# Altium PCB Controller_Hardware_SDR.PcbDoc
Units mil, origin at the board's own origin, x right, y up, seen from the top; angles counter-clockwise.
Board outline 5040 x 1990 mil, 2 copper layers (Top Layer, Bottom Layer); 27 components, 29 nets, 130 pads, 25 vias.
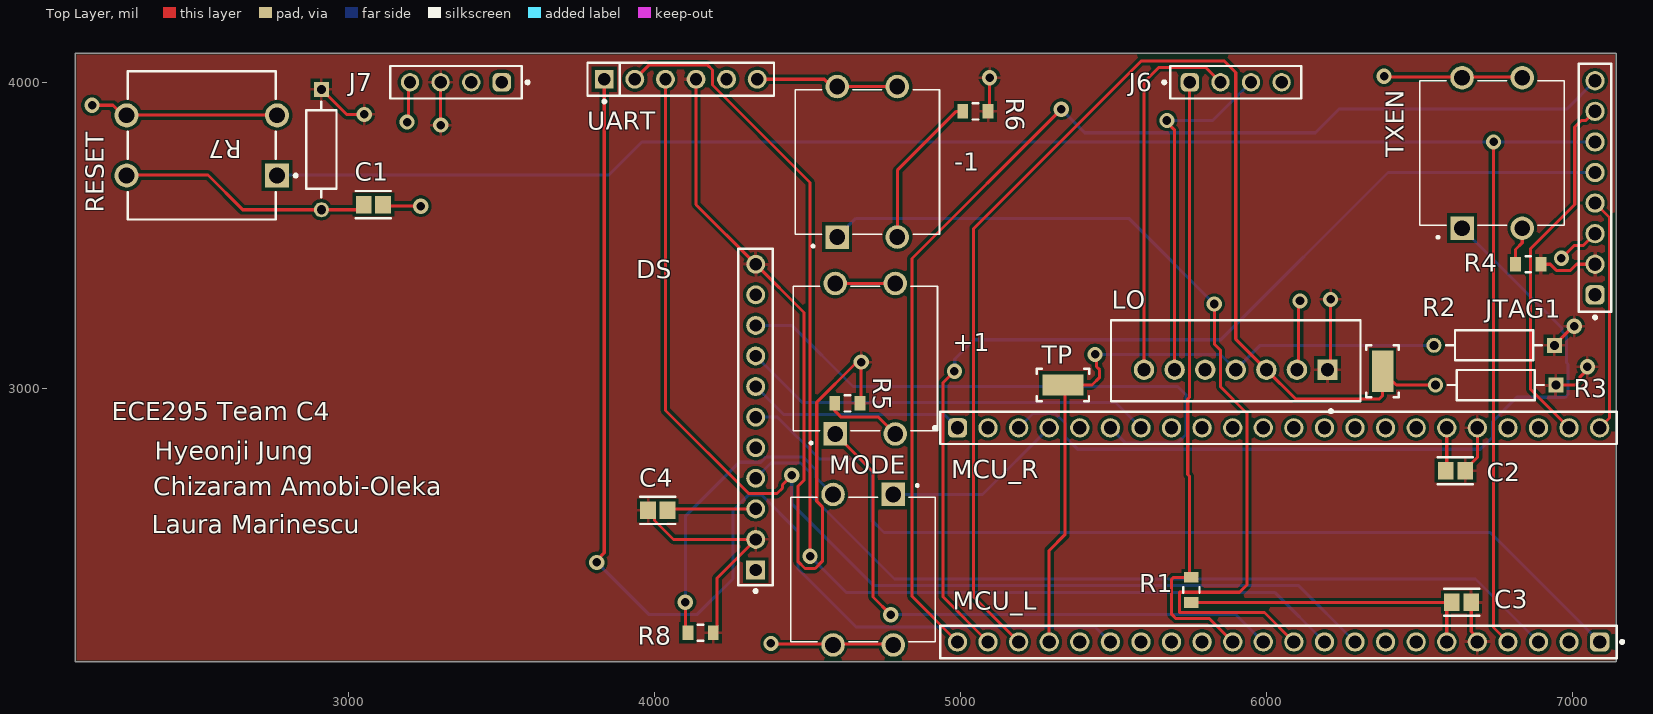
[diagram p0: Top Layer view]
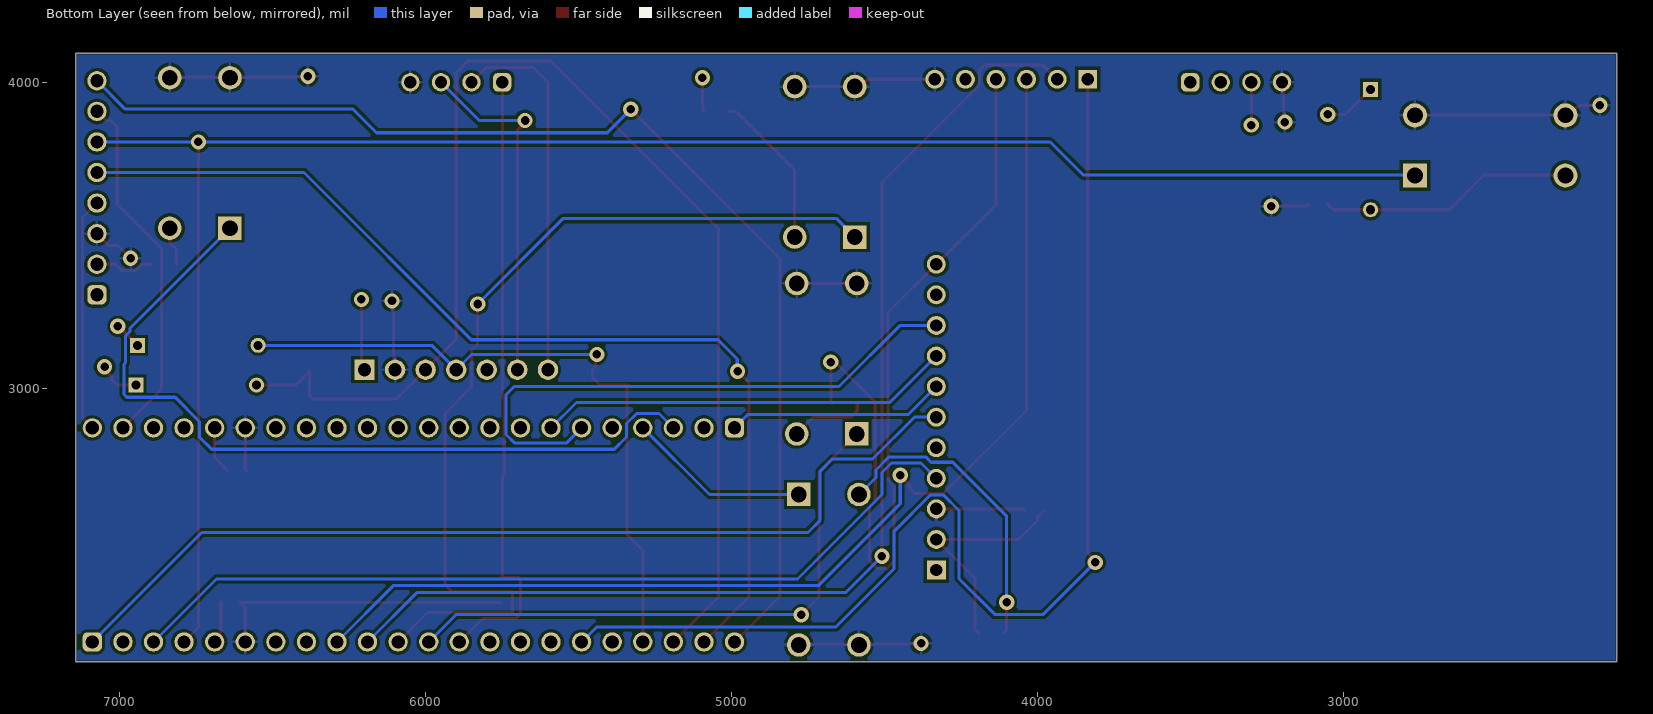
[diagram p1: Bottom Layer view, seen from below]
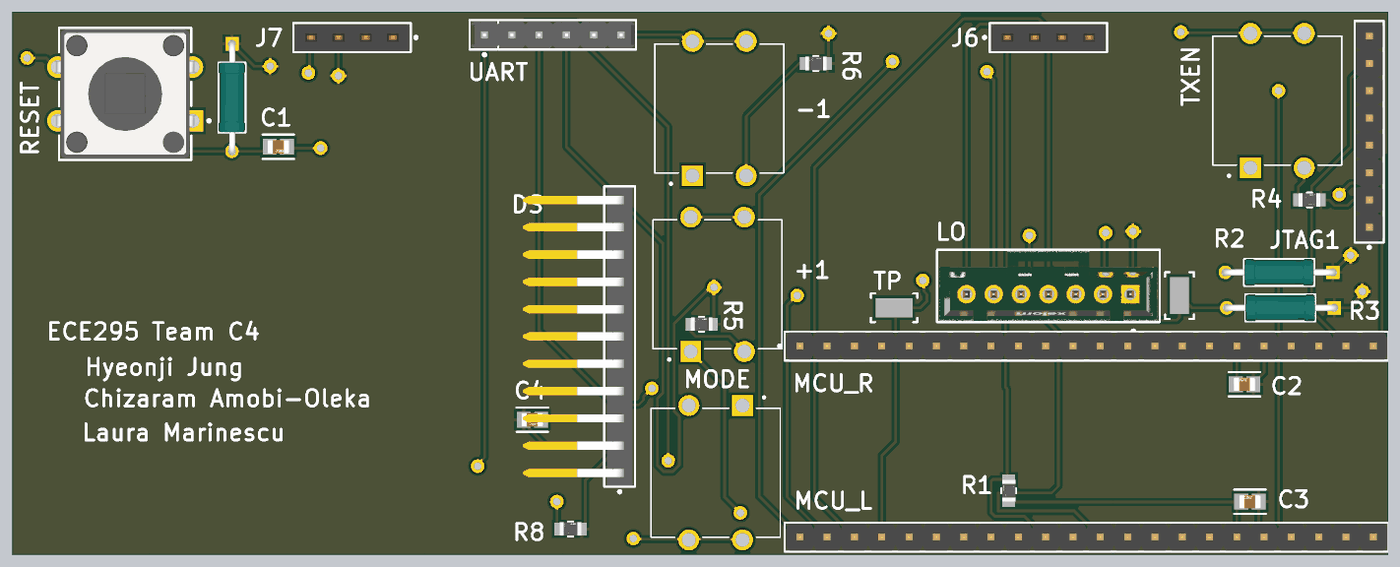
[diagram p2: 3D render of the assembled board from above, using the file's embedded part models]

## Layer stack, top to bottom
Top Solder: solder mask 0.4, Solder Resist, Dk 3.5
Top Layer: signal copper 1.4
Dielectric 1: dielectric 12.6, FR-4, Dk 4.8
Bottom Layer: signal copper 1.4
Bottom Solder: solder mask 0.4, Solder Resist, Dk 3.5

## Board outline
2105,4095 2105,2105 7145,2105 7145,4095

## Design rules (kind name [scope] priority, off if disabled: settings)
Clearance Clearance_1 [All] p1: gap=10 ignorepadtopadclearanceinfootprint=FALSE except(0: Arc-Hole Track-Hole SMDPad-Hole THPad-Hole Via-Hole Fill-Hole Poly-Hole Region-Hole Text-Hole)
Clearance [All] p2: gap=10 ignorepadtopadclearanceinfootprint=FALSE except(0: Arc-Hole Track-Hole SMDPad-Hole THPad-Hole Via-Hole Fill-Hole Poly-Hole Region-Hole Text-Hole)
HoleSize [All] p1: absolutevalues=TRUE maxlimit=200 minlimit=1 maxpercent=80.000 minpercent=20.000
PolygonConnect [All] p1: connectstyle=Relief reliefconductorwidth=10 reliefentries=4 polygonreliefangle="90 Angle" airgapwidth=10
RoutingVias [All] p1: holewidth=28 width=50 viastyle="Through Hole" minholewidth=28 minwidth=50 maxholewidth=28 maxwidth=50
SilkToSilkClearance [All] p1: silktosilkclearance=3.94
SilkToSolderMaskClearance [IsPad] p1: minsilkscreentomaskgap=7.87 clearancetoexposedcopper=TRUE
SolderMaskExpansion [All] p1: expansion=4 istentingtop=FALSE
SupplyNets "Schematic Supply Nets_1" [InNet('GND')] p1: voltage=0.000
SupplyNets "Schematic Supply Nets" [InNet('3V3')] p2: voltage=0.000
Width Width_1 [(InNet('+3.3') OR InNet('+5') OR InNet('VCC') OR InNet('ANT') or InNet('PA_OUT') or InNet('VIN'))] p1: maxlimit=20 minlimit=20 preferedwidth=20
Width [All] p2: maxlimit=10 minlimit=10 preferedwidth=10
27 further rules are at their usual default settings.

## Classes and differential pairs
component class M2_fixed_J6_j7_pins: C1 C2 C3 C4 DS J6 J7 JTAG1 LO MCU_L MCU_R R2 R3 R4 R5 R7

## Components (designator, comment, footprint, x,y, rotation, side; value= is the part's Value field where it differs from the comment)
+1 "VS-1213-67-160GF" SW_VS-1213-67-160GF 4688.43,3096.06 r90 top (schematic designator S2)
-1 "VS-1213-67-160GF" SW_VS-1213-67-160GF 4695,3740 r90 top locked (schematic designator S1)
C1 "08051C104K4T2A" FP-0805-L_2_01_0_2-W_1_25-IPC_B 3080,3600 r0 top
C2 "08051C104K4T2A" FP-0805-L_2_01_0_2-W_1_25-IPC_B 6618.28,2730 r180 top
C3 "08051C104K4T2A" FP-0805-L_2_01_0_2-W_1_25-IPC_B 6638.28,2300 r180 top
C4 "08051C104K4T2A" FP-0805-L_2_01_0_2-W_1_25-IPC_B 4010,2600 r0 top
DS "22-12-2111" FP-22-12-2111-MFG 4330,2905 r270 top locked
J6 "61300411821" 61300411821 5900,4000 r0 top locked
J7 "61300411821" 61300411821 3350,4000 r180 top locked
JTAG1 "61300811121" 61300811121 7075,3655 r90 top
LO "70543-0006" FP-70543-0006-MFG 5900,3090 r0 top
MCU_L "61302211121" 61302211121 6040,2170 r180 top locked
MCU_R "61302211121" 61302211121 6040,2870 r0 top locked
MODE "VS-1213-67-160GF" SW_VS-1213-67-160GF 4681.57,2406.06 r270 top (schematic designator S4)
R1 "RT0805FRE0710KL" FP-RT0805-MFG 5755,2340 r90 top value=10KΩ
R2 "10k" FP-MRS25-MFG 6745,3140 r180 top
R3 "10k" FP-MRS25-MFG 6750,3010 r180 top
R4 "RT0805FRE0710KL" FP-RT0805-MFG 6856.34,3405 r0 top value=10KΩ
R5 "RT0805FRE0710KL" FP-RT0805-MFG 4630,2950 r0 top value=10KΩ
R6 "RT0805FRE0710KL" FP-RT0805-MFG 5048.66,3905 r0 top value=10KΩ
R7 "10k" FP-MRS25-MFG 2910,3780 r270 top
R8 "RT0805FRE0710KL" FP-RT0805-MFG 4150,2200 r0 top value=10KΩ
RESET "FSM103" FP-FSM103-MFG 2518.94,3793.43 r0 top (schematic designator B4)
TP "0" FP-5015-MFG 5335,3010 r0 top
TXEN "VS-1213-67-160GF" SW_VS-1213-67-160GF 6738.43,3768.94 r90 top (schematic designator S3)
UART "22-28-4060" FP-22-28-4060-MFG 4085,4010 r0 top
? "5015" FP-5015-MFG 6380,3055 r90 top

## Footprints (in the part's own frame and the unit in brackets; to place one, negate y for a bottom-side part, rotate by r counter-clockwise, add the part's x,y. Pads: shape width x height; smd on the part's side, far side on the other; paste and mask are expansions set on the pad)
61300411821 [mm] "Socket Header, Pitch 2.54 mm, THT, Vertical, single row, 4p"
  rrect50% 1.52x1.52 hole 1.02: 1(-3.81,0)
  round 1.52 hole 1.02: 2(-1.27,0) 3(1.27,0) 4(3.81,0)
  silkscreen extent -6.06,-1.35 5.46,1.35, body extent -5.33,-1.25 5.33,1.25, height 8.55
61300811121 [mm] "Pin Header, pitch 2.54 mm, THT, Vertical, single row, 8p"
  rrect50% 1.6x1.6 hole 1.1: 1(-8.89,0)
  round 1.6 hole 1.1: 2(-6.35,0) 3(-3.81,0) 4(-1.27,0) 5(1.27,0) 6(3.81,0) 7(6.35,0) 8(8.89,0)
  silkscreen extent -10.88,-1.34 10.31,1.34, body extent -10.16,-1.27 10.16,1.27, height 8.57
61302211121 [mm] "Pin Header, pitch 2.54 mm, THT, Vertical, single row, 22p"
  rrect50% 1.6x1.6 hole 1.1: 1(-26.67,0)
  round 1.6 hole 1.1: 2(-24.13,0) 3(-21.59,0) 4(-19.05,0) 5(-16.51,0) 6(-13.97,0) 7(-11.43,0) 8(-8.89,0) 9(-6.35,0) 10(-3.81,0) 11(-1.27,0) 12(1.27,0) 13(3.81,0) 14(6.35,0) 15(8.89,0) 16(11.43,0) 17(13.97,0) 18(16.51,0) 19(19.05,0) 20(21.59,0) 21(24.13,0) 22(26.67,0)
  silkscreen extent -28.66,-1.34 28.09,1.34, body extent -27.94,-1.27 27.94,1.27, height 8.57
FP-22-12-2111-MFG [mm]
  rect 1.57x1.57 hole 1.02 paste-2539.97 mask+0: 1(12.7,0)
  round 1.57 hole 1.02 paste-2539.97 mask+0: 2(10.16,0) 3(7.62,0) 4(5.08,0) 5(2.54,0) 6(0,0) 7(-2.54,0) 8(-5.08,0) 9(-7.62,0) 10(-10.16,0) 11(-12.7,0)
  silkscreen extent -13.97,-1.43 14.57,1.43, body extent -14.07,-10.49 14.07,1.53, height 0.25
FP-22-28-4060-MFG [mm]
  rect 1.57x1.57 hole 1.02 paste-2539.97 mask+0: 1(-6.35,0)
  round 1.57 hole 1.02 paste-2539.97 mask+0: 2(-3.81,0) 3(-1.27,0) 4(1.27,0) 5(3.81,0) 6(6.35,0)
  silkscreen extent -7.75,-1.97 7.75,1.37, body extent -7.85,-1.47 7.85,1.47, height 0.25
FP-0805-L_2_01_0_2-W_1_25-IPC_B [mil]
  rect 51.36x57.33 smd paste+0 mask+0: 1(-31.72,0) 2(31.72,0)
  silkscreen extent -57,-44 57,44, body extent -67,-39 67,39, height 10
FP-5015-MFG [mm]
  rect 3.43x1.78 smd paste+0 mask+0: 1(0,0)
  silkscreen extent -2.16,-1.34 2.17,1.34
FP-70543-0006-MFG [mm]
  rect 1.69x1.69 hole 1.09 paste-2539.97 mask+0: 1(7.62,-0.76)
  round 1.69 hole 1.09 paste-2539.97 mask+0: 2(5.08,-0.76) 3(2.54,-0.76) 4(0,-0.76) 5(-2.54,-0.76) 6(-5.08,-0.76) 7(-7.62,-0.76)
  silkscreen extent -10.36,-4.33 10.36,3.36, body extent -10.46,-3.46 10.46,3.46, height 0.25
FP-FSM103-MFG [mm]
  rect 2x2 hole 1.3 paste-2539.97 mask+0: 1(6.25,-2.5)
  round 2 hole 1.3 paste-2539.97 mask+0: 2(-6.25,-2.5) 3(6.25,2.5) 4(-6.25,2.5)
  silkscreen extent -6.15,-6.15 7.93,6.15, body extent -7.35,-6.25 7.35,6.25, height 0.25
FP-MRS25-MFG [mm]
  rect 1.25x1.25 hole 0.75 paste-2539.97 mask+0: 1(-5,0)
  round 1.25 hole 0.75 paste-2539.97 mask+0: 2(5,0)
  silkscreen extent -3.97,-1.25 3.97,1.25, body extent -5.72,-1.35 5.72,1.35, height 0.25
FP-RT0805-MFG [mm]
  rect 0.9x1.2 smd paste+0 mask+0: 1(-1.05,0) 2(1.05,0)
  silkscreen extent -0.22,-0.67 0.22,0.67, body extent -1.6,-0.77 1.6,0.77, height 0.25
SW_VS-1213-67-160GF [mm]
  rect 1.95x1.95 hole 1.3: 1(-6.25,2.5)
  round 1.95 hole 1.3: 2(-6.25,-2.5) 3(6.25,2.5) 4(6.25,-2.5)
  silkscreen extent -7.1,-6 6,6

## Part data
+1 -1 MODE TXEN: "Flat Type PCB Mount 12 x 12mm Tact Switches", Package=None, Availability=Unavailable, MP=VS-1213-67-160GF, Price=None
C1 C2 C3 C4: library part CMP-2007-04172-2, "Automotive Ceramic Capacitor, 0805, 100nF, 10%, X7R, 15%, 100V", Capacitance=100nF, Case Code (Imperial)=0805, Case Code (Metric)=2012, Dielectric=X7R, Dielectric Material=Ceramic, Max Operating Temperature=125°C, Min Operating Temperature=-55°C, Package Quantity=1, Ratings=AEC-Q200, Tolerance=10%, Voltage=100V, Case/Package=0805, Construction=Flat, Depth=1.25mm, Height=1.4mm, Lead Free="Lead Free", Length=2.01mm, Mount="Surface Mount", Number of Pins=2, Packaging="Tape and Reel", Radiation Hardening=No, REACH SVHC="No SVHC", RoHS Compliant=Yes, Series=-, Termination=SMD/SMT, Thickness=0.055inch, Voltage Rating=100V, Voltage Rating (DC)=100V, Width=0.049inch
DS: library part CMP-04776-000920-1, "KK 100 HDR FLAT RTAN 11 CKT GOLD", Color=White, Contact Resistance=10mR, Current Rating=4A, Flammability Rating="UL94 V-0", Insulation Resistance=50GR, Max Operating Temperature=75°C, Min Operating Temperature=0°C, Package Quantity=10, Voltage Rating=250V, Connector Type="Male Pin", Contact Material=Brass, Contact Mating Length=0.369inch, Contact Plating=Gold, Contact Type="Male Pin", Gender=Male, Glow Wire Compliant=Non-compliant, Halogen Free="Low Halogen", Housing Color=White, Housing Material=Nylon, Lead Free="Contains Lead", Mount="Through Hole", Number of Circuits=11, Number of Contacts=11, Number of Positions=11, Number of Rows=1, Orientation="Right Angle", Packaging=Bulk, Pitch=2.54mm, Radiation Hardening=No, RoHS Compliant=Yes, Series="KK® 4094", Termination=Solder, Voltage Rating (DC)=250V
J6 J7: library part CMP-1502-01316-3, Contact Resistance=20mΩ, Current Rating=3A, Operating Supply Voltage=250V, Gender=Female, Lead Pitch=2.54mm, NexarPartId=61924712, Number of Pins=4, Orientation=Vertical, RoHS=Non-Compliant
JTAG1: library part CMP-1502-01076-3, Color=Black, Contact Resistance=20mΩ, Current Rating=3A, Max Operating Temperature=105°C, Min Operating Temperature=-40°C, Operating Supply Voltage=250V, Connector Type="Male Pin", Contact Material=Copper, Contact Mating Length=5.9944mm, Contact Plating=Gold, Gender=Male, Height=8.54mm, Lead Pitch=2.54mm, Mount="Through Hole", NexarPartId=32855533, Number of Contacts=8, Number of Pins=8, Number of Positions=8, Number of Rows=1, Orientation=Vertical, Packaging=Bulk, Pitch=2.54mm, REACH SVHC=Unknown, RoHS=Compliant, Termination=Solder, Voltage Rating=250V
LO: library part CMP-04776-000019-1, "CONN HEADER VERT 7POS 2.54MM", Current Rating=3A, Manufacturer=Molex, Package=0, Temperature="-40°C to +105°C", Temperature Range High=+105°C, Temperature Range Low=-40°C, Voltage Rating=250V, Automotive=No, Category=Conn, ComponentLink2Description=Datasheet, ComponentLink2URL=https://www.molex.com/webdocs/datasheets/pdf/en-us/0705430006_PCB_HEADERS.pdf, Conn Gender=Male, Conn Orientation=Vertical, Contact Material=Gold,Nickel, Device Class L1=Connectors, Device Class L2="Headers and Wire Housings", Device Class L3=unset, Digikey Description="CONN HEADER VERT 7POS 2.54MM", Footprint Url=https://www.molex.com/pdm_docs/sd/705430006_sd.pdf, Height=12.07mm, Lead Free=Yes, Manufacturer Part Number=70543-0006, Mouser Description="Conn Shrouded Header (4 Sides) HDR 7 POS 2.54mm Solder ST Thru-Hole SL™ Tube", Number of Contacts=7, Number of Rows=1, Octopart=https://octopart.com/70543-0006-molex-277837, Pitch=2.54mm, RoHS=TRUE, Standoff Height=0.25mm
MCU_L MCU_R: library part CMP-1502-01106-3, Color=Black, Contact Resistance=20mΩ, Current Rating=3A, Operating Supply Voltage=250V, Connector Type="Male Pin", Contact Material=Copper, Contact Mating Length=5.9944mm, Contact Plating=Gold, Gender=Male, Lead Pitch=2.54mm, Mount="Through Hole", NexarPartId=32855558, Number of Contacts=22, Number of Pins=22, Number of Positions=22, Number of Rows=1, Orientation=Vertical, Packaging=Bulk, Pitch=2.54mm, REACH SVHC=Unknown, RoHS=Compliant, Termination=Solder
R1 R4 R5 R6 R8: library part CMP-03412-023097-1, "RES 10.0K OHM 1/8W 1% SMD 0805", Manufacturer=Yageo, Package=RT0805, Power Rating=0.125W, Resistance=10KΩ, Temperature="-55°C to +155°C", Temperature Coefficient="50 ppm/°C", Temperature Range High=+155°C, Temperature Range Low=-55°C, Tolerance=0.0001, Voltage Rating=150V, Automotive=No, Category=Res, ComponentLink2Description=Datasheet, ComponentLink2URL=http://www.yageo.com/documents/recent/PYu-RT_1-to-0.01_RoHS_L_9.pdf, Composition="Thin Film", Device Class L1="Passive Components", Device Class L2=Resistors, Device Class L3="Chip SMD Resistors", Digikey Description="RES 10.0K OHM 1/8W 1% SMD 0805", Footprint Url=http://www.yageo.com/exep/pages/download/literatures/PYu-R_Mount_10.pdf, Height=0.6mm, Ipc Land Pattern Name=RESC200125X50, Lead Free=Yes, Manufacturer Part Number=RT0805FRE0710KL, Mouser Description="Thin Film Resistors 1/8W 10K ohm 1% 50ppm", Octopart=https://octopart.com/rt0805fre0710kl-yageo-40301150, RoHS=TRUE, Series=RT
R2 R3 R7: library part CMP-00030-42632392-1, "MRS25000C1002FCT00 Resistor, 10 kOhm, ± 1%, 600 mW, Axial Leaded, Metal Film (Thin Film), Professional", Case/Package=Conformal, Max Operating Temperature=155°C, Max Power Dissipation=600mW, Min Operating Temperature=-55°C, Resistance=10kΩ, Temperature Coefficient=50ppm/°C, Tolerance=1%, Voltage Rating=350V, Composition="Metal Film, Thin Film", Contact Plating=Tin, Diameter=2.5mm, Lead Free="Lead Free", Lead Length=26mm, Length=6.5mm, Military Standard=Not, Mount="Through Hole", NexarPartId=42632392, Number of Pins=2, Number of Terminations=2, Power Rating=600mW, Radiation Hardening=No, REACH SVHC=Unknown, RoHS=Compliant, Schedule B="8533210090, 8533210090", Termination=Axial, Voltage Rating (DC)=350V, Width=2.5mm
RESET: library part CMP-03407-000037-1, "SWITCH TACTILE SPST-NO 0.05A 24V", Actuator Color=Black, Contact Current Rating=50mA, Contact Resistance=100mR, Max Operating Temperature=85°C, Max Voltage Rating (DC)=12V, Min Operating Temperature=-35°C, Operating Force=1.57N, Package Quantity=400, Voltage Rating=24V, Actuator Length=3.4mm, Actuator Material=Polyester, Contact Material=Brass, Contact Plating=Silver, Current Rating=50mA, Depth=14.1mm, Electrical Life=100000Cycles, Illumination Type=Non-Illuminated, Length=12mm, Max Current Rating=50mA, Mechanical Life=100000Cycles, Mount="Through Hole", Orientation=Straight, Packaging="Loose Piece", Radiation Hardening=No, RoHS Compliant=Yes, Series="FSM100 ~ 104", Switch Function=Off-Mom, Switch Travel=0.3mm, Termination="PC Pins", Throw Configuration=SPST, Type=Switch, Voltage Rating (DC)=12V, Width=12mm
TP: library part CMP-2000-05183-2, "PC TEST POINT MINIATURE", Manufacturer=keystone, Manufacturer Part Number=5015, Automotive=No, Category=Conn, ComponentLink2Description=Datasheet, ComponentLink2URL=http://www.keyelco.com/product-pdf.cfm?p=1353, Conn Orientation=Straight, Contact Material=Silver, Device Class L1=Connectors, Device Class L2=unset, Device Class L3=unset, Digikey Description="PC TEST POINT MINIATURE", Height=1.65mm, Lead Free=Yes, Number of Contacts=1, Octopart=https://octopart.com/5015-keystone-3822, Package=5015, RoHS=TRUE
UART: library part CMP-04776-000763-1, "CONN HEADER VERT 6POS 2.54MM", Color=Black, Contact Resistance=20mR, Current Rating=4A, Max Operating Temperature=75°C, Max Voltage Rating (AC)=250V, Max Voltage Rating (DC)=250.25kV, Min Operating Temperature=0°C, Package Quantity=1, Connector Type="Male Pin", Contact Material=Brass, Contact Mating Length=0.24inch, Contact Plating=Tin, Contact Type="Male Pin", Depth=2.49mm, Gender=Male, Housing Color=Black, Housing Material=Thermoplastic, Length=15.24mm, Mount="Through Hole", Number of Contacts=6, Number of Positions=6, Number of Rows=1, Orientation=Straight, Packaging=Bulk, Pitch=2.54mm, RoHS Compliant=Yes, Series="KK® 42375", Termination=Solder, Voltage Rating=250V
?: library part CMP-2000-05183-2, "PC TEST POINT MINIATURE", Manufacturer=keystone, Automotive=No, Category=Conn, ComponentLink2Description=Datasheet, ComponentLink2URL=http://www.keyelco.com/product-pdf.cfm?p=1353, Conn Orientation=Straight, Contact Material=Silver, Device Class L1=Connectors, Device Class L2=unset, Device Class L3=unset, Digikey Description="PC TEST POINT MINIATURE", Height=1.65mm, Lead Free=Yes, Manufacturer Part Number=5015, Number of Contacts=1, Octopart=https://octopart.com/5015-keystone-3822, Package=5015, RoHS=TRUE

## Via types
v1: diameter 50, hole 28, Top Layer to Bottom Layer, 25 vias

## Nets (pads, with @x,y where several pads share a name; then routed paths per layer and width w, separated by ;. In a path a pad name is that pad's centre, name@x,y a point inside that pad or via, vN(x,y) a via of type N, cw(c..) or ccw(c..) an arc to the next point about the centre after c; other vN are vias at no path point)
3V3: C2.1 C3.1 C4.1 DS.2 DS.11 J7.3 JTAG1.2 LO.1 MCU_L.5 MCU_R.18 R2.1 R3.1 R4.2 R5.2 R6.2 R7.1 R8.2 UART.4 | length 4848.5
  Top Layer w10: R7.1 2991.85,3895 v1(3050,3895) ; v1(3300,3860) J7.3 ; C4.1 3998.96,2579.32 3998.96,2567.21 4061.16,2505 DS.2 4204.05,2379.05 4204.05,2212.72 R8.2 ; UART.4 4135,3600 DS.11 4488,3247 4488,2698.43 4468,2678.43 4468,2433.43 4491.43,2410 4524.57,2410 4548,2433.43 4548,2611.78 4529.76,2630.01 4529.76,2953.65 4653.46,3077.35 4667.35,3077.35 v1(4675,3085) 4675,2953.66 R5.2 ; R6.2 5095,3910 v1(5095,4015) ; v1(6210,3290) 6210,3070.08 LO.1 LO.1@6210.08,3050 ; C2.1 6650,2732.98 6690,2772.98 MCU_R.18 ; C3.1 6670,2204.34 6690,2184.34 MCU_L.5 ; R4.2 6928.43,3405 6948.43,3385 6994.55,3385 7014.55,3405 JTAG1.2 ; R2.1 7003.77,3201.92 v1(7006.92,3201.92) ; R3.1 7010,3010 7026.17,3026.17 7026.17,3037.26 7050,3061.09 v1(7050,3070)
/TXEN: J6.1 MCU_L.13 R1.2 | length 2044.2
  Top Layer w10: J6.1 5749,4000 5749,2970 5743,2964 5743,2718 5749,2712 R1.2@5749,2381.34 ; R1.2 R1.2@5749,2381.34 ; MCU_L.13 5814.06,2245.94 5704.27,2245.94 5690.22,2260 5690.22,2375.22 5696.34,2381.34 R1.2@5749,2381.34
B1: -1.1 MCU_L.11 | length 3047.6
  Top Layer w10: v1(5830,3275) 5830,3144.09 5850,3124.09 5850,3004 5937,2917 5937,2357 5912.38,2332.38 5716.38,2332.38 5716.38,2265.94 5994.06,2265.94 MCU_L.11
  Bottom Layer w10: -1.1 4657.64,3555 5550,3555 v1(5830,3275)
B2: +1.1 MCU_L.12 | length 1921.3
  Top Layer w10: +1.1 4714,2726 4714,2317 v1(4772,2259)
  Bottom Layer w10: v1(4772,2259) 5901,2259 MCU_L.12
B3: MCU_R.3 TXEN.1 | length 2681.5
  Bottom Layer w10: MCU_R.3 5237,2917 5310,2917 5343,2884 5343,2840 5383,2800 6700,2800 6740,2840 6740,2891 6819,2970 6977.28,2970 6986.46,2979.18 6986.46,3077.8 6981.46,3082.8 6981.46,3170.82 6966.92,3185.35 6966.92,3195.95 TXEN.1
B4: MCU_R.4 MODE.1 | length 600.2
  Bottom Layer w10: MODE.1 5072.13,2652.13 MCU_R.4
DTR: MCU_L.17 UART.1 | length 3904
  Top Layer w10: v1(3810,2430) 3810,2436.57 3835,2461.57 UART.1
  Bottom Layer w10: v1(3810,2430) 3980,2260 4139,2260 4256,2377 4256,2600 4307,2651 4348.92,2651 4468,2531.92 4468,2410 4659,2219 5441,2219 MCU_L.17
GND: +1.3 +1.4 -1.3 -1.4 C1.2 C2.2 C3.2 C4.2 DS.3 J6.4 J7.4 JTAG1.3 LO.2 MCU_L.6 MCU_R.17 MODE.3 MODE.4 R1.1 RESET.3 RESET.4 TXEN.3 TXEN.4 UART.6 | length 4192.8
  Top Layer w10: v1(2160,3925) 2228.62,3925 2260.2,3893.43 2273.94,3893.43 RESET.3@2766.06,3893.43 ; C1.2 3116.72,3595 v1(3235,3595) ; v1(3190,3870) 3195,3875 3195,3995 J7.4 ; C4.2 4046.72,2605 DS.3 ; UART.6 4554.57,4010 4578.51,3986.06 -1.3 -1.4 ; v1(4380,2165) 4382.5,2162.5 4777.5,2162.5 MODE.3 ; +1.3 +1.4 ; R1.1 6605.21,2298.66 C3.2 6590,2283.45 MCU_L.6 ; LO.2 6105,3065.08 6105,3280 v1(6110,3285) ; v1(6385,4020) 6387.5,4017.5 6834.35,4017.5 TXEN.4 ; C2.2 6590,2733.45 MCU_R.17 ; v1(6965,3425) 7006.46,3466.46 7036.46,3466.46 JTAG1.3
I2C_SCL: LO.4 MCU_L.19 R2.2 TP.1 | length 2234.6
  Top Layer w10: MCU_L.19 5290,2469 5341,2520 TP.1@5341,3010 ; TP.1 TP.1@5341,3010 ; v1(5440,3110) 5444.59,3105.41 5444.59,3070 5455,3059.59 5455,3035 5430,3010 TP.1@5341,3010
  Bottom Layer w10: v1(5440,3110) 5850.08,3110 LO.4 5979.92,3140 R2.2
I2C_SDA: ?.1 LO.3 MCU_L.20 R3.2 | length 4220.4
  Top Layer w10: MCU_L.20 5043,2317 5043,3522 5590,4069 5863,4069 5900,4032 5900,3160.08 LO.3 6095.08,2965 6370,2965 6380,2975 ?.1 6425,3010 R3.2
LCD_RESET: DS.8 MCU_R.7 | length 1357.3
  Bottom Layer w10: DS.8 4482,2953 5507,2953 MCU_R.7
LCD_RS: DS.9 MCU_R.6 | length 1909.6
  Bottom Layer w10: DS.9 4448.43,3205 4648.43,3005 5710.14,3005 5737,2978.14 5737,2848 5710,2821 5539,2821 MCU_R.6
LO_F1_0: J6.2 LO.7 | length 1230.5
  Top Layer w10: LO.7 5600,4000 5649,4049 5801,4049 J6.2
LO_FI_90: J6.3 LO.6 | length 1152.1
  Top Layer w10: v1(5675,3875) 5675,3868.43 5700,3843.43 LO.6
  Bottom Layer w10: v1(5675,3875) 5825,3875 J6.3
NetB4_2: C1.1 R7.2 RESET.2 | length 831.7
  Top Layer w10: RESET.2@2273.94,3696.57 2539.25,3696.57 2652.68,3583.15 R7.2 3033.15,3583.15 3050,3600 C1.1
NetR4_1: R4.1 TXEN.2 | length 126.9
  Top Layer w10: R4.1 6815,3453 6836.85,3474.85 TXEN.2
NetR5_1: +1.2 R5.1 | length 253.5
  Top Layer w10: R5.1 4588.66,2926.34 4610,2905 4731.85,2905 +1.2
NetR6_1: -1.2 R6.1 | length 511.9
  Top Layer w10: -1.2 4793.43,3712 4986.43,3905 R6.1
NetR8_1: MODE.2 R8.1 | length 1013.4
  Top Layer w10: v1(4100,2300) 4100,2208.66 R8.1
  Bottom Layer w10: v1(4100,2300) 4100,2581 4276.43,2757.43 4347.35,2757.43 4364.92,2775 4484.85,2775 4527.61,2732.24 4527.61,2707.66 MODE.2
RESET: JTAG1.6 MCU_L.4 RESET.1 | length 6008.3
  Top Layer w10: v1(6743,3805) 6743,2217 MCU_L.4
  Bottom Layer w10: RESET.1@2766.06,3696.57 3849.57,3696.57 3958,3805 v1(6743,3805) JTAG1.6
RXD: MCU_L.10 UART.2 | length 3800.6
  Top Layer w10: UART.2 3982,4057 4172,4057 4189,4040 4189,3991 4508,3672 v1(4508,2450)
  Bottom Layer w10: v1(4508,2450) 4627,2331 6029,2331 MCU_L.10
SPI_CS: DS.7 MCU_R.1 | length 715.9
  Bottom Layer w10: DS.7 4421,2914 4946,2914 MCU_R.1
SPI_MOSI: DS.6 MCU_L.1 | length 3158.2
  Bottom Layer w10: DS.6 4401.72,2905 4538.72,2768 4670,2768 4710,2728 4710,2568 4750,2528 6732,2528 MCU_L.1
SPI_SCK: DS.4 MCU_L.3 | length 2865.1
  Bottom Layer w10: DS.4 4380,2755 4476.57,2755 4507.61,2723.96 4507.61,2652.16 4783.78,2376 6684,2376 MCU_L.3
TCK: JTAG1.5 MCU_L.21 | length 3348.3
  Top Layer w10: v1(4980,3055) 4943,3018 4943,2317 MCU_L.21
  Bottom Layer w10: v1(4980,3055) 4981,3056 4981,3095 5044,3158 5851,3158 6398,3705 JTAG1.5
TDI: JTAG1.7 MCU_R.21 | length 1183.4
  Top Layer w10: MCU_R.21 6864,2996 6864,3456 7008.5,3600.5 7008.5,3853.5 7030,3875 7045,3875 JTAG1.7
TDO: JTAG1.4 MCU_R.22 | length 767.7
  Top Layer w10: JTAG1.4 7122,3558 7122,2902 MCU_R.22
TMS: JTAG1.8 MCU_L.22 | length 3854.2
  Top Layer w10: MCU_L.22 4841,2319 4841,3424 v1(5329,3912)
  Bottom Layer w10: v1(5329,3912) 5406,3835 6160.91,3835 6237.91,3912 6982,3912 JTAG1.8
TXD: MCU_L.9 UART.3 | length 3762.8
  Top Layer w10: UART.3 4035,2927 4307,2655 4400,2655 4417.7,2672.7 4417.7,2683.78 4448,2714.09 v1(4448,2715)
  Bottom Layer w10: v1(4448,2715) 4448,2622 4716,2354 6106,2354 MCU_L.9
pads on no net: DS.1 DS.5 DS.10 J7.1 J7.2 JTAG1.1 LO.5 MCU_L.2 MCU_L.7 MCU_L.8 MCU_L.14 MCU_L.15 MCU_L.16 MCU_L.18 MCU_R.2 MCU_R.5 MCU_R.8 MCU_R.9 MCU_R.10 MCU_R.11 MCU_R.12 MCU_R.13 MCU_R.14 MCU_R.15 MCU_R.16 MCU_R.19 MCU_R.20 UART.5

## Polygon pours and split planes (outlines as drawn)
3V3 on Top Layer "3V3_L01_P000" (solid, pour order 0): 2110,4090 2110,2110 7140,2110 7140,4090
GND on Bottom Layer "GND_L02_P001" (solid, pour order 1): 2110,4090 2110,2110 7140,2110 7140,4090

## Silkscreen, mask and mechanical layers (free items; w line width, h text height)
Top Overlay:
  text "ECE295 Team C4" at 2225,2895 h60
  text "Hyeonji Jung" at 2365,2764.99 h60
  text "Chizaram Amobi-Oleka" at 2360,2650 h60
  text "Laura Marinescu" at 2355,2525 h60
Mechanical 1:
  the board outline again, w10